# Altium PCB blank.PcbDoc
Units mm, origin at the board's own origin, x right, y up, seen from the top; angles counter-clockwise.
Board outline 86.37 x 22.71 mm, 2 copper layers (Top Layer, Bottom Layer); 2 components, 70 nets, 1 pads, 4 vias.
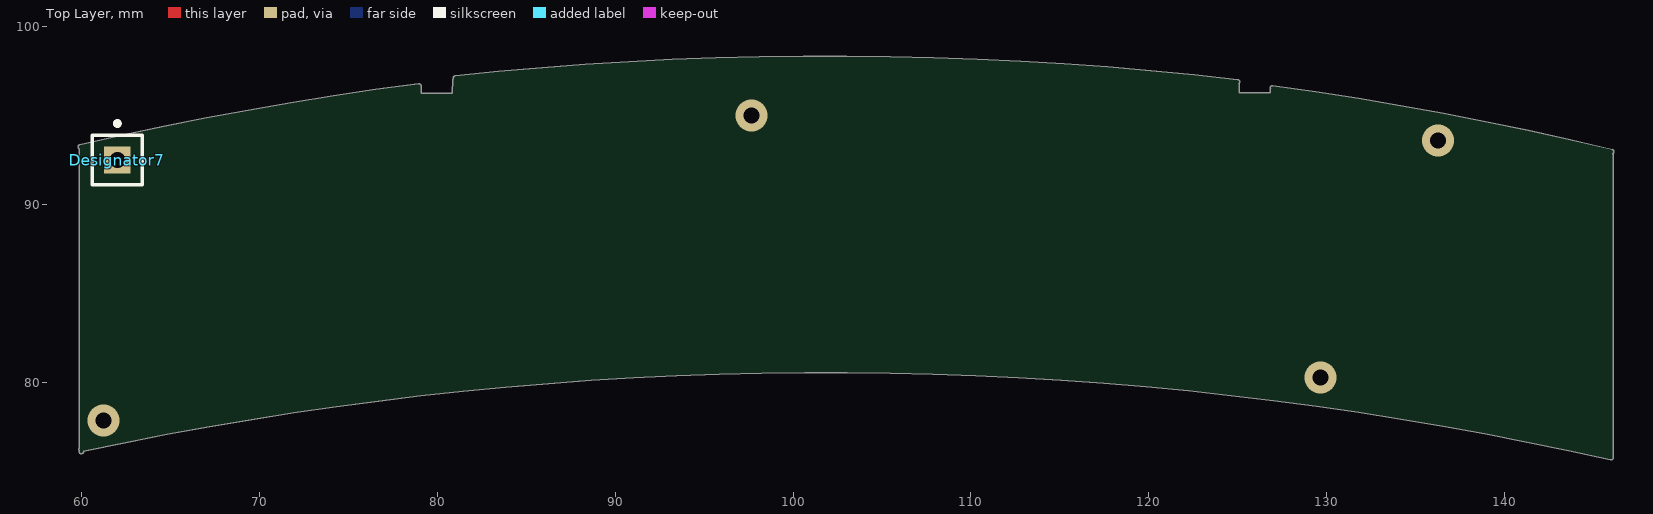
[diagram p0: Top Layer view]
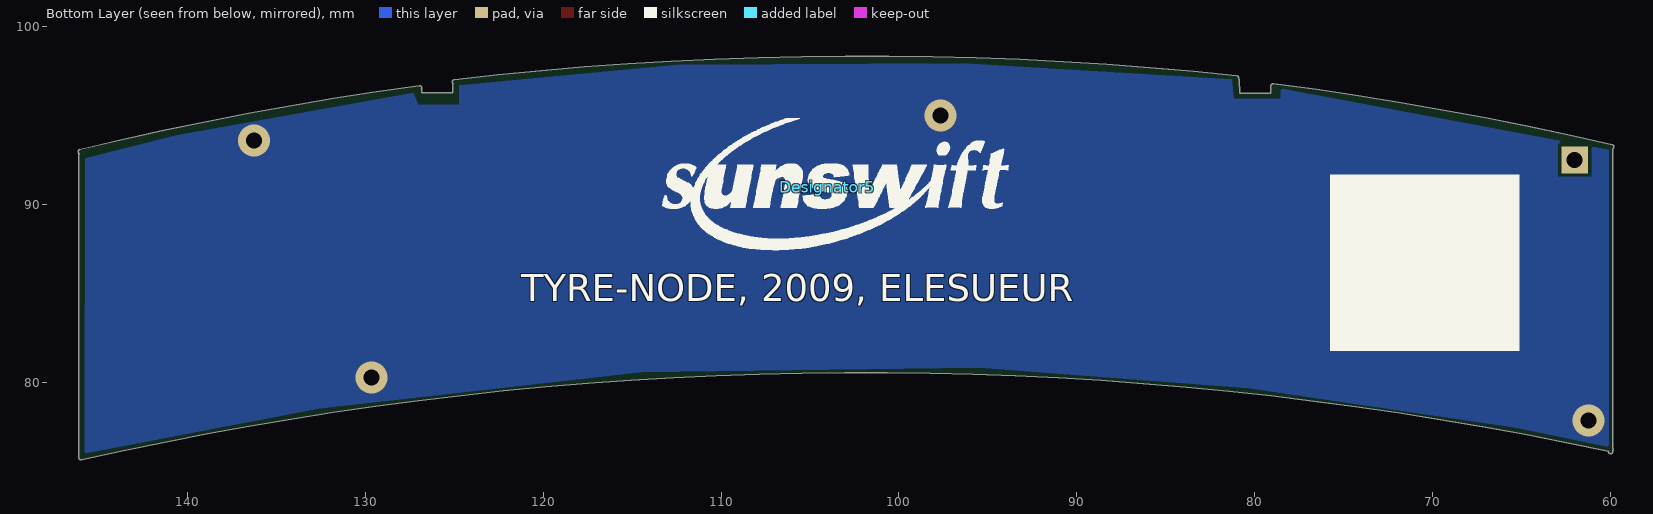
[diagram p1: Bottom Layer view, seen from below]

## Layer stack, top to bottom
Top Layer: signal copper 0.0356
Dielectric: dielectric 0.32, FR-4, Dk 4.8
Bottom Layer: signal copper 0.0356

## Board outline
59.846,76.158 cw(c59.96,76.214) 59.846,76.271 59.846,93.105 cw(c59.974,93.105) 59.848,93.128 cw(c59.919,93.234) 59.89,93.358 cw(c104.868,-101.649) 78.933,96.791 cw(c78.95,96.664) 79.069,96.709 cw(c78.967,96.633) 79.094,96.633 79.094,96.26 80.844,96.26 80.874,97.014 cw(c81.001,97.009) 80.894,97.077 cw(c81.017,97.108) 81.004,97.235 cw(c102.049,-101.783) 125.005,97.023 cw(c124.991,96.897) 125.118,96.897 cw(c124.991,96.897) 125.073,96.8 cw(c124.978,96.716) 125.105,96.716 cw(c124.978,96.716) 125.105,96.713 125.097,96.285 126.84,96.285 126.84,96.446 cw(c126.967,96.446) 126.853,96.502 cw(c126.967,96.558) 126.984,96.684 cw(c99.502,-101.547) 146.066,93.088 cw(c146.036,92.964) 146.164,92.964 cw(c146.036,92.964) 146.094,92.85 cw(c146,92.764) 146.127,92.764 146.127,75.764 cw(c146,75.764) 146.073,75.66 cw(c145.992,75.758) 145.964,75.634 ccw(c101.94,-119.33) 60.101,76.114 60.101,76.105 cw(c59.974,76.105) 59.846,76.105

## Design rules (kind name [scope] priority, off if disabled: settings)
Clearance [All] p1: gap=0.203
PolygonConnect PolygonConnect_1 [All vs IsNamedPolygon('Bottom Layer-GND')] p1: connectstyle=Direct reliefconductorwidth=0.254 reliefentries=4 polygonreliefangle="90 Angle"
PolygonConnect [All] p2: connectstyle=Relief reliefconductorwidth=0.254 reliefentries=4 polygonreliefangle="90 Angle"
RoutingVias [All] p1: holewidth=0.4 width=0.8 viastyle="Through Hole" minholewidth=0.4 minwidth=0.8 maxholewidth=0.4 maxwidth=0.8
SilkscreenOverComponentPads [All] p1 off: minsilkscreentomaskgap=0.254
SolderMaskExpansion [All] p1: expansion=0.102
TestPointUsage [All] p1: valid=0 allowmultiple=FALSE
Testpoint [All] p1: side=15 testpointundercomponent=TRUE minsize=1.016 maxsize=2.54 preferedsize=1.524 minholesize=0 maxholesize=1.016 preferedholesize=0.813 testpointgrid=0.025 style=1023 order=0-112345678
Width [All] p1: maxlimit=0.5 minlimit=0.2 preferedwidth=0.2
23 further rules are at their usual default settings.

## Components (designator, comment, footprint, x,y, rotation, side; value= is the part's Value field where it differs from the comment)
Designator5 "Comment" SUNSWIFTLOGO 104,91 r180 bottom
Designator7 "Comment" PIN1 62,92.5 r0 top

## Footprints (in the part's own frame and the unit in brackets; to place one, negate y for a bottom-side part, rotate by r counter-clockwise, add the part's x,y. Pads: shape width x height; smd on the part's side, far side on the other; paste and mask are expansions set on the pad)
PIN1 [mm] "Generic Antenna; 1 Lead"
  rect 1.5x1.5 hole 0.9: 1(0,0)
  silkscreen extent -1.4,-1.4 1.4,2.17
SUNSWIFTLOGO [mm] "Sunswift Logo"
  silkscreen extent -9.32,-3.58 10.19,3.81

## Via types
v1: diameter 1.8, hole 0.9, Top Layer to Bottom Layer, 4 vias

## Nets (pads, with @x,y where several pads share a name; then routed paths per layer and width w, separated by ;. In a path a pad name is that pad's centre, name@x,y a point inside that pad or via, vN(x,y) a via of type N, cw(c..) or ccw(c..) an arc to the next point about the centre after c; other vN are vias at no path point)
3V: 
"3V SWITCHED": 
/RESET: 
ADC0: 
ADC1: 
ADC2: 
ADC3: 
ADC4: 
ADC5: 
ADC6: 
ADC7: 
GND: 
  other v1: 61.214,77.851 129.667,80.264 136.271,93.599 97.663,94.996
NetD1_2: 
NetE1_1: 
NetMAX6675_2: 
NetMAX6675_3: 
NetQ1_1: 
NetQ1_3: 
NetQ2_1: 
NetQ2_3: 
NetR4_1: 
P1.0: 
P1.1: 
P1.2: 
P1.3: 
P1.4: 
P1.5: 
P1.6: 
P1.7: 
P2.0: 
P2.1: 
P2.2: 
P2.3: 
P2.4: 
P2.5: 
P2.6: 
P2.7: 
P3.0: 
P3.1: 
P3.2: 
P3.3: 
P3.4: 
P3.5: 
P3.6: 
P3.7: 
P4.0: 
P4.1: 
P4.2: 
P4.3: 
P4.4: 
P4.5: 
P4.6: 
P4.7: 
P5.0: 
P5.1: 
P5.2: 
P5.3: 
P5.4: 
P5.5: 
P5.6: 
P5.7: 
TCK: 
TDI: 
TDO: 
TMS: 
VREF: 
XT1IN: 
XT1OUT: 
XT2IN: 
XT2OUT: 
pads on no net: Designator7.1

## Polygon pours and split planes (outlines as drawn)
GND on Bottom Layer "Bottom Layer-GND" (solid, remove dead copper, pour order 1000): 59.969,76.327 60.071,76.429 60.071,93.066 78.511,96.52 78.537,95.936 81.178,95.936 81.28,97.028 96.342,97.942 112.497,97.841 124.714,96.698 124.714,95.606 127.025,95.606 127.305,96.266 140.64,93.878 145.771,92.608 145.796,75.997 132.664,78.511 114.452,80.569 95.504,80.823 80.366,79.654 65.303,77.445 59.969,76.327

## Silkscreen, mask and mechanical layers (free items; w line width, h text height)
Bottom Overlay:
  rectangle: 65.1,81.763 75.768,91.694
  text "TYRE-NODE, 2009, ELESUEUR" at 121.234,84.557 h1.52
Mechanical 1:
  lines w0.2: 59.72,75.771 59.72,93.432 ; 78.967,96.918 78.967,96.387 80.85,96.387 80.895,97.536 ; 146.127,75.377 146.127,93.091 ; 125.118,96.158 126.873,96.158 125.118,96.158
  lines w0.254: 59.673,75.771 cw(c101.94,-119.711) 145.992,75.377 ; 59.674,93.559 cw(c104.868,-101.268) 78.95,97.045 ; 81.017,97.616 cw(c102.049,-101.275) 124.991,97.405 ; 125.118,96.181 125.118,97.282 ; 126.873,96.158 126.873,96.652 ; 126.967,96.685 cw(c99.502,-101.42) 146.036,93.091